# Altium PCB ALight.PcbDoc
Units mm, origin at the board's own origin, x right, y up, seen from the top; angles counter-clockwise.
Board outline 21.5 x 10 mm, 2 copper layers (Top Layer, Bottom Layer), stack 1.036 mm thick; 14 components, 12 nets, 67 pads, 21 vias.
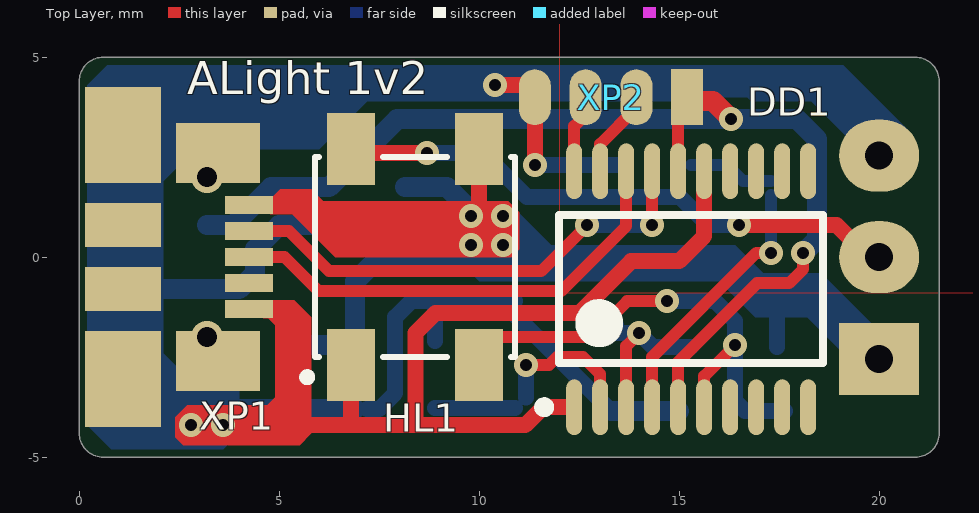
[diagram p0: Top Layer view]
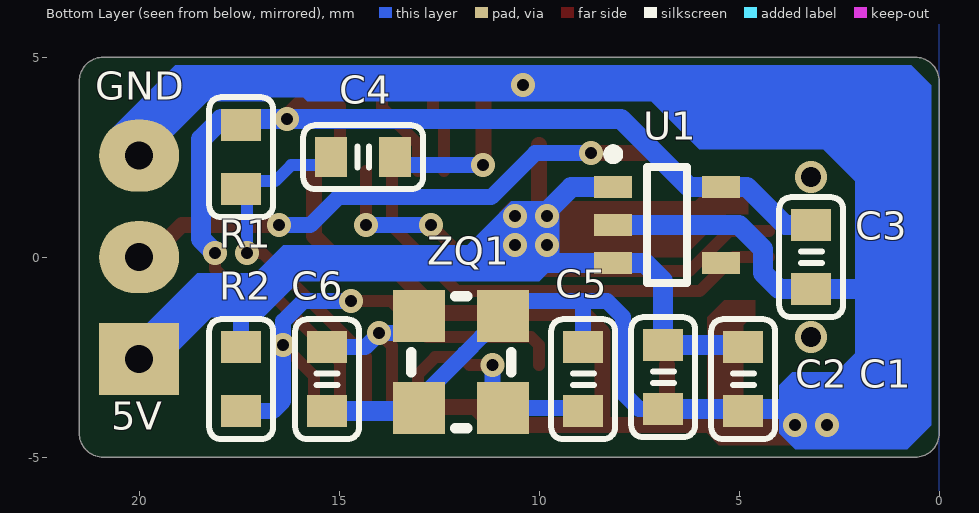
[diagram p1: Bottom Layer view, seen from below]

## Layer stack, top to bottom
Top Solder: solder mask 0.01, Solder Resist, Dk 3.5
Top Layer: signal copper 0.018
Dielectric 1: dielectric 1, FR-4, Dk 4.8
Bottom Layer: signal copper 0.018
Bottom Solder: solder mask 0.01, Solder Resist, Dk 3.5

## Board outline
0,-4.4 0,4.4 cw(c0.6,4.4) 0.6,5 20.9,5 cw(c20.9,4.4) 21.5,4.4 21.5,-4.4 cw(c20.9,-4.4) 20.9,-5 0.6,-5 cw(c0.6,-4.4)

## Design rules (kind name [scope] priority, off if disabled: settings)
BoardOutlineClearance [All] p1: gap=0.4
Clearance [All] p1: gap=0.2 except(0.3: Arc-Poly Track-Poly SMDPad-Poly THPad-Poly Via-Poly; 0.5: Fill-Poly Poly-Poly Poly-Region)
DiffPairsRouting [All] p1: maxlimit=5 minlimit=0.25 mostfreqgap=0.254 toplayer_minwidth=0.25 toplayer_maxwidth=0.5 toplayer_prefwidth=0.381 bottomlayer_minwidth=0.25 bottomlayer_maxwidth=0.5 bottomlayer_prefwidth=0.381 maxuncoupledlength=12.7
MaxMinImpedance [All] p1: minimum=98,00 maximum=110,0
PlaneConnect [All] p1: planeconnectstyle=Relief reliefexpansion=0.508 reliefentries=4 reliefconductorwidth=0.25 reliefairgap=0.3
PolygonConnect [All] p1: connectstyle=Relief reliefconductorwidth=0.254 reliefentries=4 polygonreliefangle="90 Angle" airgapwidth=0.254
RoutingVias [All] p1: holewidth=0.3 width=0.6 viastyle="Through Hole" minholewidth=0.3 minwidth=0.6 maxholewidth=2 maxwidth=3
SilkToSilkClearance [All] p1: silktosilkclearance=0.1
SilkToSolderMaskClearance [IsPad] p1: minsilkscreentomaskgap=0.1 clearancetoexposedcopper=TRUE
SolderMaskExpansion [All] p1: expansion=0.102
Width [All] p1: maxlimit=2 minlimit=0.2 preferedwidth=0.5
26 further rules are at their usual default settings.

## Components (designator, comment, footprint, x,y, rotation, side; value= is the part's Value field where it differs from the comment)
C1 "0.1u" "CAPACITOR 0603" 4.9,-2.25 r270 bottom
C2 "1u" "CAPACITOR 0603" 6.9,-2.2 r270 bottom
C3 "1u" "CAPACITOR 0603" 3.2,0.8 r270 bottom
C4 "0.1u" "CAPACITOR 0603" 15.2,2.5 r180 bottom
C5 "12p" "CAPACITOR 0603" 8.9,-2.25 r270 bottom
C6 "12p" "CAPACITOR 0603" 15.3,-3.85 r90 bottom
DD1 "STM32F070F6P6" TSOP-20 15.3,-0.8 r90 top locked
HL1 "WS2812B" "LED WS2812" 8.4,0 r270 top locked
R1 "10k" "RESISTOR 0603" 17.45,3.3 r270 bottom
R2 "1k" "RESISTOR 0603" 17.45,-2.25 r270 bottom
U1 "LDK220M33R" SOT23-5 6.8,0.8 r180 bottom
XP1 "USB-micro" USB-micro -0.3,0 r0 top locked
XP2 "PLS-4" SWD 15.2,4 r180 top
ZQ1 "16MHz" SMD0302C4 12.8,-1.575 r90 bottom

## Footprints (in the part's own frame and the unit in brackets; to place one, negate y for a bottom-side part, rotate by r counter-clockwise, add the part's x,y. Pads: shape width x height; smd on the part's side, far side on the other; paste and mask are expansions set on the pad)
"CAPACITOR 0603" [mm]
  rect 0.8x1 smd: 1(0,0) 2(1.6,0)
  silkscreen extent -0.7,-0.8 2.3,0.8, body extent -0.01,-0.38 1.64,0.42, height 0.81
"LED WS2812" [mm]
  rect 1.8x1.2 smd: 1(-2.7,1.6) 2(-2.7,-1.6) 3(2.7,-1.6) 4(2.7,1.6)
  silkscreen extent -2.5,-2.8 3.1,2.5, body extent -2.7,-2.5 2.7,2.5, height 1.72
"RESISTOR 0603" [mm]
  rect 0.8x1 smd: 1(0,0) 2(1.6,0)
  silkscreen extent -0.7,-0.8 2.3,0.8, body extent -0.01,-0.38 1.64,0.42, height 0.31
SMD0302C4 [mm] "SMD05032C4"
  rect 1.3x1.3 smd: 1(-2.2,-1.9) 2(0.1,-1.9) 3(0.1,0.2) 4(-2.2,0.2)
  silkscreen extent -2.7,-2.1 0.6,0.4, body extent -2.65,-2.1 0.55,0.4, height 0.8
SOT23-5 [mm] "SOT23, 5-Leads, Body 2,90x2,80mm, Pitch 0,95mm, IPC Medium Density"
  rect 0.95x0.55 smd: 1(-1.35,0.95) 2(-1.35,0) 3(-1.35,-0.95) 4(1.35,-0.95) 5(1.35,0.95)
  silkscreen extent -1.48,-1.45 0.5,1.9, body extent -0.87,-1.45 0.87,1.45, height 0.9
SWD [mm]
  rect 0.8x1.4 smd: 1(0,0)
  oval 0.8x1.4 smd: 2(1.27,0) 3(2.54,0) 4(3.81,0)
TSOP-20 [mm] "TSOP, 20-Leads"
  oval 1.4x0.4 smd: 1(-2.95,2.925) 2(-2.95,2.275) 3(-2.95,1.625) 4(-2.95,0.975) 5(-2.95,0.325) 6(-2.95,-0.325) 7(-2.95,-0.975) 8(-2.95,-1.625) 9(-2.95,-2.275) 10(-2.95,-2.925) 11(2.95,-2.925) 12(2.95,-2.275) 13(2.95,-1.625) 14(2.95,-0.975) 15(2.95,-0.325) 16(2.95,0.325) 17(2.95,0.975) 18(2.95,1.625) 19(2.95,2.275) 20(2.95,2.925)
  silkscreen extent -3.07,-3.3 1.85,3.8, body extent -2.25,-3.3 2.25,3.3, height 1.2
USB-micro [mm]
  rect 1.9x2.4 smd: 0(1.4,-3.05) 0(1.4,3.05)
  rect 1.9x1.1 smd: 0(1.4,-0.8) 0(1.4,0.8)
  rect 2.1x1.5 smd: 0(3.775,-2.6) 0(3.775,2.6)
  rect 1.2x0.45 smd: 1(4.55,1.3) 2(4.55,0.65) 3(4.55,0) 4(4.55,-0.65) 5(4.55,-1.3)
  body extent -0.7,-3.99 4.73,3.99, height 2.68

## Part data
C1 C2 C3 C4 C5 C6: library part SMD-CAP, "Capacitor"
DD1: "Controller"
HL1: "LED"
R1 R2: library part SMD-RES, "Resistor"
U1: library part TPS76333DBVR, "POWER"
XP1: library part USB-M, "Connector"
XP2: library part XP4, "Connector"
ZQ1: library part Quartz, "Quartz"

## Free pads (board coordinates)
  rect 2x1.8 hole 0.7: 0(20,-2.54)
  oval 2x1.8 hole 0.7: 0(20,0) 0(20,2.54)

## Via types
v1: diameter 0.6, hole 0.3, Top Layer to Bottom Layer, tented both sides, 19 vias
v2: diameter 0.8, hole 0.5, Top Layer to Bottom Layer, tented both sides, 2 vias

## Nets (pads, with @x,y where several pads share a name; then routed paths per layer and width w, separated by ;. In a path a pad name is that pad's centre, name@x,y a point inside that pad or via, vN(x,y) a via of type N, cw(c..) or ccw(c..) an arc to the next point about the centre after c; other vN are vias at no path point)
3V3: C3.1 DD1.5 DD1.16 R1.1 U1.5 XP2.1 | length 28.1
  Top Layer w0.3: DD1.5 14.975,-2.618 16.943,-0.65 17.75,-0.65 18.1,-0.3 v1(18.1,0.1) ; DD1.16 XP2.1@14.975,3.775
  Top Layer w0.5: XP2.1@15.2,3.9 15.85,3.9 v1(16.3,3.45)
  Bottom Layer w0.5: C3.1 3.85,0.8 4.8,1.75 U1.5 6.25,1.75 7.95,3.45 17.95,3.45 18.45,2.95 18.45,0.45 v1(18.1,0.1)
5V: C1.1 C2.1 HL1.1 pad.0@20,-2.54 R2.1 U1.1 U1.3 XP1.1 | length 12.4
  Top Layer w0.4: v1@10,0.9 HL1.1@10,2.8
  Bottom Layer w0.4: R2.1 17.45,-1.2
  Bottom Layer w0.5: C1.1@5.3,-2.2 C2.1 6.9,-0.6 7.35,-0.15 U1.3 10.1,-0.15 ; U1.1 9.2,1.75 v1@10.45,0.5
  other v1: 9.8,0.3 10.6,0.3 9.8,1.025 10.6,1.025
DIN: DD1.6 HL1.4 R2.2 | length 12.6
  Top Layer w0.3: HL1.4 10,-2.2 10.2,-2 12.8,-2 13.7,-1.1 v1(14.7,-1.1) ; DD1.6 15.625,-2.975 v1@16.25,-2.35
  Bottom Layer w0.4: v1(14.7,-1.1) 15.9,-1.1 16.4,-1.6 v1(16.4,-2.2) 16.4,-3.6 16.65,-3.85 R2.2@17.65,-3.85
DOUT: HL1.2 pad.0@20,0 | length 14
  Top Layer w0.4: HL1.2@7.4,2.6 v1(8.7,2.6) ; v1(16.5,0.8) 16.507,0.807 18.93,0.807 19.738,0 pad.0@20,0
  Bottom Layer w0.4: v1(8.7,2.6) 10.1,2.6 11.2,1.5 15.025,1.5 15.725,0.8 v1@16.504,0.8 ; pad.0@19.8,-0.2 pad.0@20,0
GND: C1.2 C2.2 C3.2 C4.2 C5.1 C6.1 DD1.1 DD1.15 HL1.3 pad.0@20,2.54 U1.2 XP1.5 XP2.4 ZQ1.2 ZQ1.4 | length 48
  Top Layer w0.4: 5.4,-4.2 6.8,-4.2 ; HL1.3 6.8,-4.2 ; 8.412,-4.2 8.412,-1.89 8.903,-1.4 12.5,-1.4 13.8,-0.1 15,-0.1 15.625,0.525 DD1.15 ; v1(10.4,4.3) XP2.4@11.09,4.3 ; v1@11.39,2.3 XP2.4 ; DD1.1 11.6,-3.75 11.15,-4.2 6.8,-4.2
  Bottom Layer w0.4: C2.2@7.2,-3.8 7.5,-3.8 7.9,-3.4 7.9,-1.5 8.3,-1.1 8.9,-1.1 ; C5.1@8.9,-2.1 8.9,-1.1 ; ZQ1.2@10.875,-1.425 11.45,-2 11.456,-2 11.866,-2.41 11.866,-2.416 ZQ1.4@13.3,-3.85 ; ZQ1.2@10.9,-1.1 8.9,-1.1 ; v1(11.4,2.3) C4.2@13.6,2.3
  Bottom Layer w0.5: 1.7,-0.8 C3.2 4,-0.8 4.4,-0.4 4.4,0.2 5,0.8 U1.2 ; 3.837,-3.8 C2.2 ; ZQ1.4@13.3,-3.85 C6.1@15,-3.85
  other v1: 2.8,-4.2 3.6,-4.2
NetC4_1: C4.1 DD1.4 R1.2 | length 8.9
  Top Layer w0.3: DD1.4 14.325,-2.494 16.926,0.107 v1(17.3,0.107)
  Bottom Layer w0.3: C4.1@15.3,2.3 16.2,2.3 16.6,1.9 R1.2@17.3,1.9 ; v1(17.3,0.107) R1.2@17.3,1.55
NetC5_2: C5.2 DD1.2 ZQ1.1 | length 5.8
  Top Layer w0.3: v1(11.166,-2.7) 11.74,-2.7 11.94,-2.5 12.6,-2.5 13.025,-2.925 DD1.2
  Bottom Layer w0.4: C5.2@8.9,-3.775 ZQ1.1 ; ZQ1.1@11.166,-3.509 v1(11.166,-2.7)
NetC6_2: C6.2 DD1.3 ZQ1.3 | length 4.6
  Top Layer w0.3: DD1.3 13.675,-2.225 v1(14,-1.9)
  Bottom Layer w0.4: ZQ1.3@13,-1.9 v1(14,-1.9) 14.35,-2.25 C6.2 ; ZQ1.3@13.325,-1.8 ZQ1.3@13.425,-1.7
SW_CLK: DD1.20 XP2.3 | length 2
  Top Layer w0.3: DD1.20 12.375,3.275 12.66,3.56 XP2.3
SW_DIO: DD1.19 XP2.2 | length 2.2
  Top Layer w0.3: DD1.19 13.025,2.825 13.93,3.73 XP2.2
USB_DM: DD1.17 XP1.2 | length 12.3
  Top Layer w0.3: XP1.2 5.25,0.65 6.25,-0.35 11.55,-0.35 v1(12.7,0.8) ; v1(14.325,0.8) DD1.17
  Bottom Layer w0.4: v1(12.7,0.8) v1(14.325,0.8)
USB_DP: DD1.18 XP1.3 | length 11.8
  Top Layer w0.3: XP1.3 5.138,0 5.988,-0.85 12.05,-0.85 13.675,0.775 DD1.18
pads on no net: DD1.7 DD1.8 DD1.9 DD1.10 DD1.11 DD1.12 DD1.13 DD1.14 U1.4 XP1.0 XP1.4
copper on no net:
  other v2: 3.2,-2 3.2,2

## Polygon pours and split planes (outlines as drawn)
NetC4_1 on Top Layer "Top Layer-No Net" (solid, remove dead copper, shelved, pour order 0): 12,9.5 12,-0.885 23.4,-0.885 23.4,9.5
GND on Bottom Layer "Bottom Layer-No Net" (solid, shelved, pour order 6): 1.5,-8 cw(c1.5,-6.5) 0,-6.5 0,8 cw(c1.5,8) 1.5,9.5 49.4,9.5 cw(c49.4,8) 50.9,8 50.9,-6.5 cw(c49.4,-6.5) 49.4,-8

## Other copper
Top Layer:
  region net 5V: 4.775,1.075 5.325,1.075 6.4,0 10.8,0 11,0.2 11,1.125 10.725,1.4 6.1,1.4 5.8,1.7 5.025,1.7 4.775,1.45
  region net GND: 4.6,-1.075 5.375,-1.075 5.8,-1.5 5.8,-4.4 5.513,-4.7 2.6,-4.7 2.4,-4.5 2.4,-4 2.7,-3.7 4.7,-3.7 4.9,-3.5 4.9,-1.7 4.725,-1.525 4.6,-1.525
Bottom Layer:
  region net 5V: 9.5,1.1 9.8,1.4 10.7,1.4 11.8,0.3 16.4,0.3 17.1,-0.4 18.55,-0.4 20,-1.85 20,-3.2 19.9,-3.2 18.2,-1.5 16.9,-1.5 16,-0.6 10,-0.6 9.5,-0.1
  region net GND: 20.7,3.2 19.1,4.8 0.7,4.8 0.2,4.3 0.2,-4.2 0.8,-4.8 3.6,-4.8 4,-4.4 4,-3.2 3.675,-2.875 2.575,-2.875 2.1,-2.4 2.1,1.9 2.9,2.7 6,2.7 7.2,3.9 15.8,3.9 15.9,4 16.7,4 16.8,3.9 18.3,3.9 19.4,2.8 19.4,2.3 19.5,2.2 20.7,2.2

## Silkscreen, mask and mechanical layers (free items; w line width, h text height)
Top Overlay:
  text "ALight 1v2" at 2.7,3.8 h1.4
Bottom Overlay:
  text "GND" at 21.1,3.7 h1.2
  text "5V" at 20.7,-4.55 h1.2
Mechanical 2:
  the board outline again, w0.2
Mechanical 3:
  text "GND" at 11.7,5.3 h0.8 r90
  text "SW_CLK" at 12.9,5.3 h0.8 r90
  text "SW_DIO" at 14.2,5.3 h0.8 r90
  text "3V3" at 15.5,5.3 h0.8 r90
  text "GND" at 21.8,2 h1.5
  text "DOUT" at 21.8,-0.5 h1.5
  text "STM32F070F6P6" at 12.5,-0.8 h0.8
  text "WS2812B" at 6.5,-0.9 h1
  text "USB-micro" at 3.1,-1.7 h0.8 r90
  text "5V" at 21.8,-3 h1.5
Mechanical 4:
  text "10k" at 18.1,4.2 h1
  text "LDK220M33R" at 9.5,3.8 h1
  text "0.1u" at 12.6,2.7 h1
  text "GND" at 24.7,2 h1.5
  text "DOUT" at 25.6,-0.5 h1.5
  text "1u" at 1.9,-1 h1
  text "5V" at 23.5,-3 h1.5
  text "0.1u" at 5.7,-5.9 h1
  text "1u" at 7.3,-5.9 h1
  text "22p" at 9.5,-5.9 h1
  text "16 MHz" at 13.5,-5.9 h1
  text "22p" at 16,-5.9 h1
  text "1k" at 17.8,-5.9 h1